# Altium PCB Centre_Console_3.0.PcbDoc
Units mm, origin at the board's own origin, x right, y up, seen from the top; angles counter-clockwise.
Board outline 60 x 50 mm, 2 copper layers (Top Layer, Bottom Layer); 35 components, 41 nets, 224 pads, 23 vias.
Unrouted connection lines stored in the file: 1.
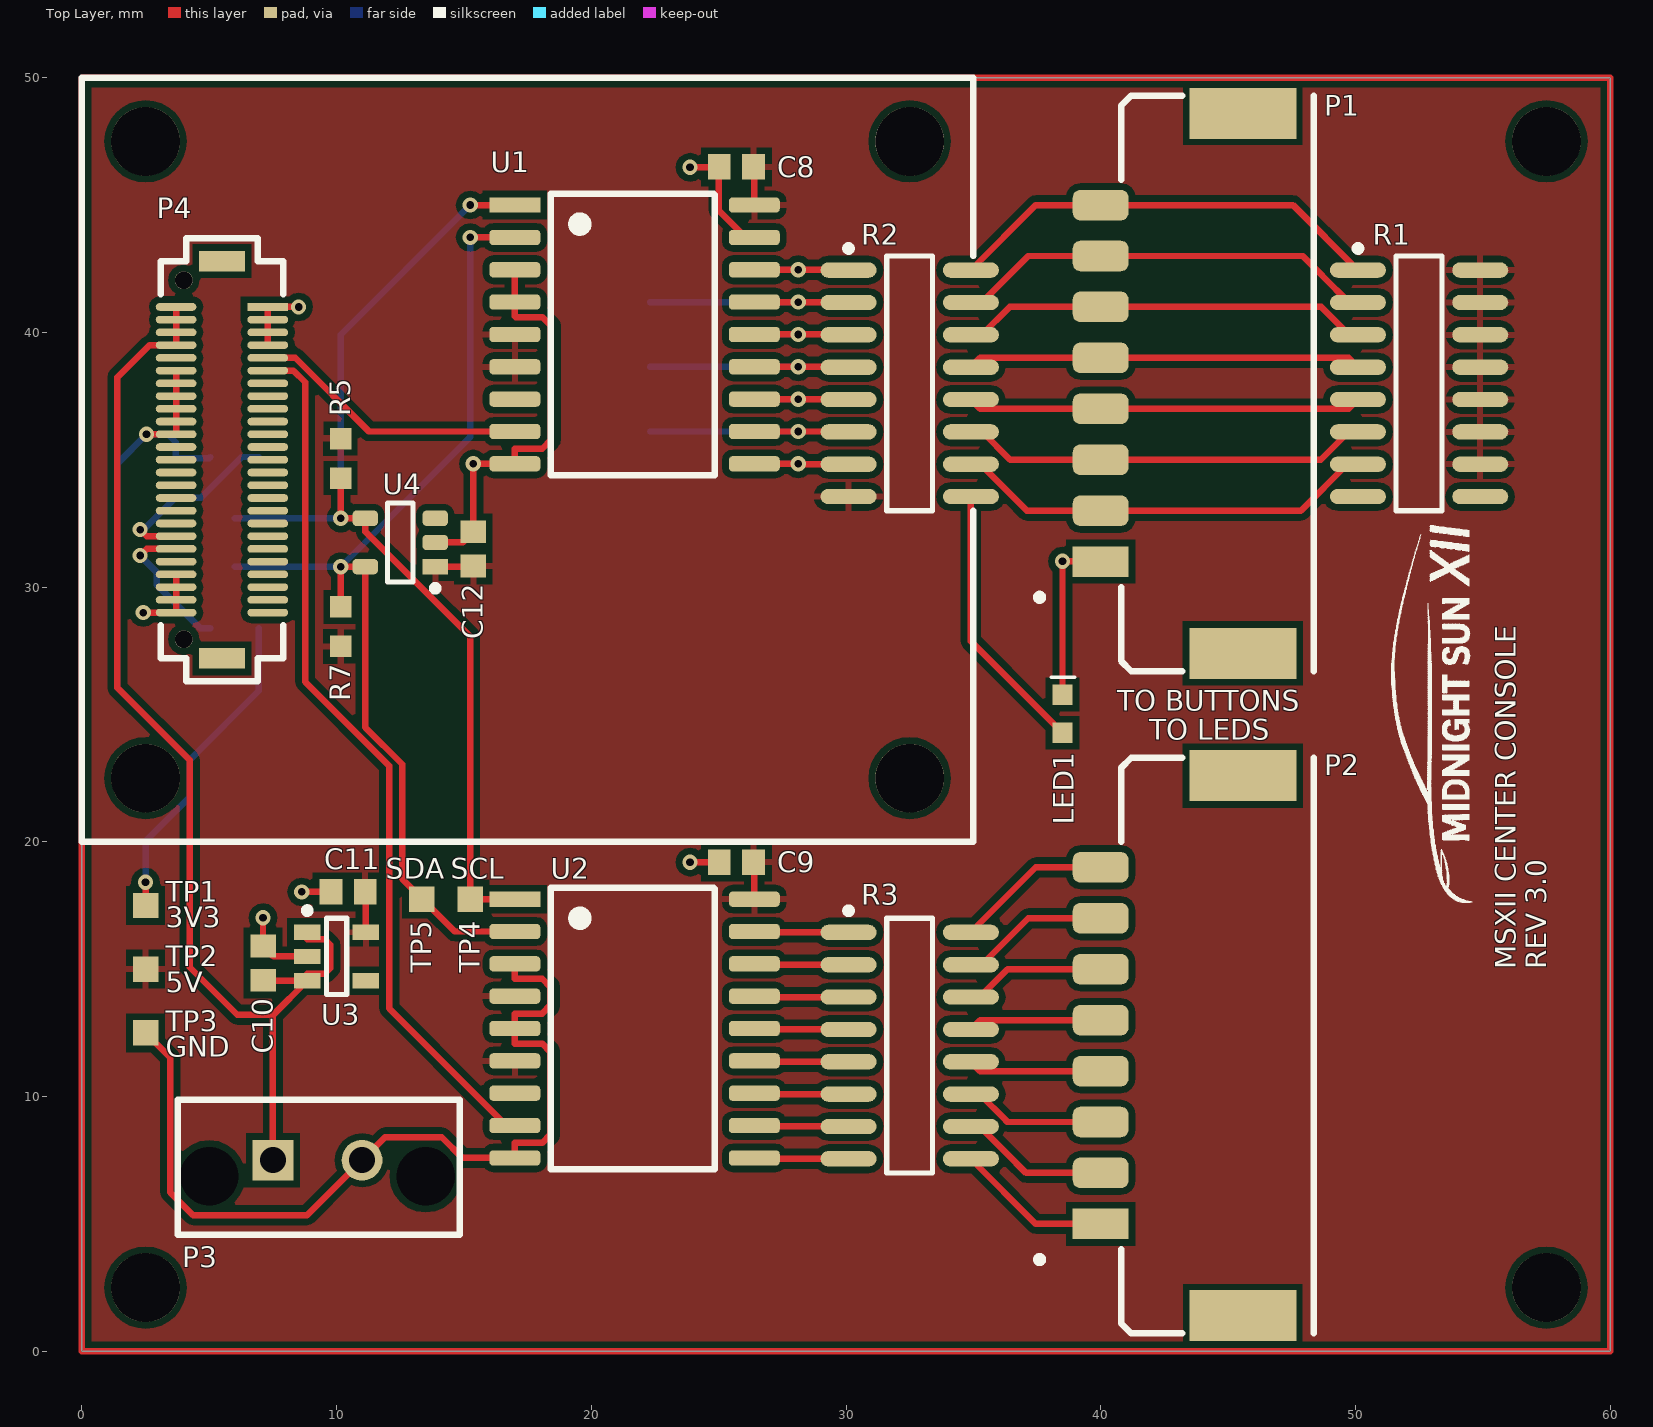
[diagram p0: Top Layer view]
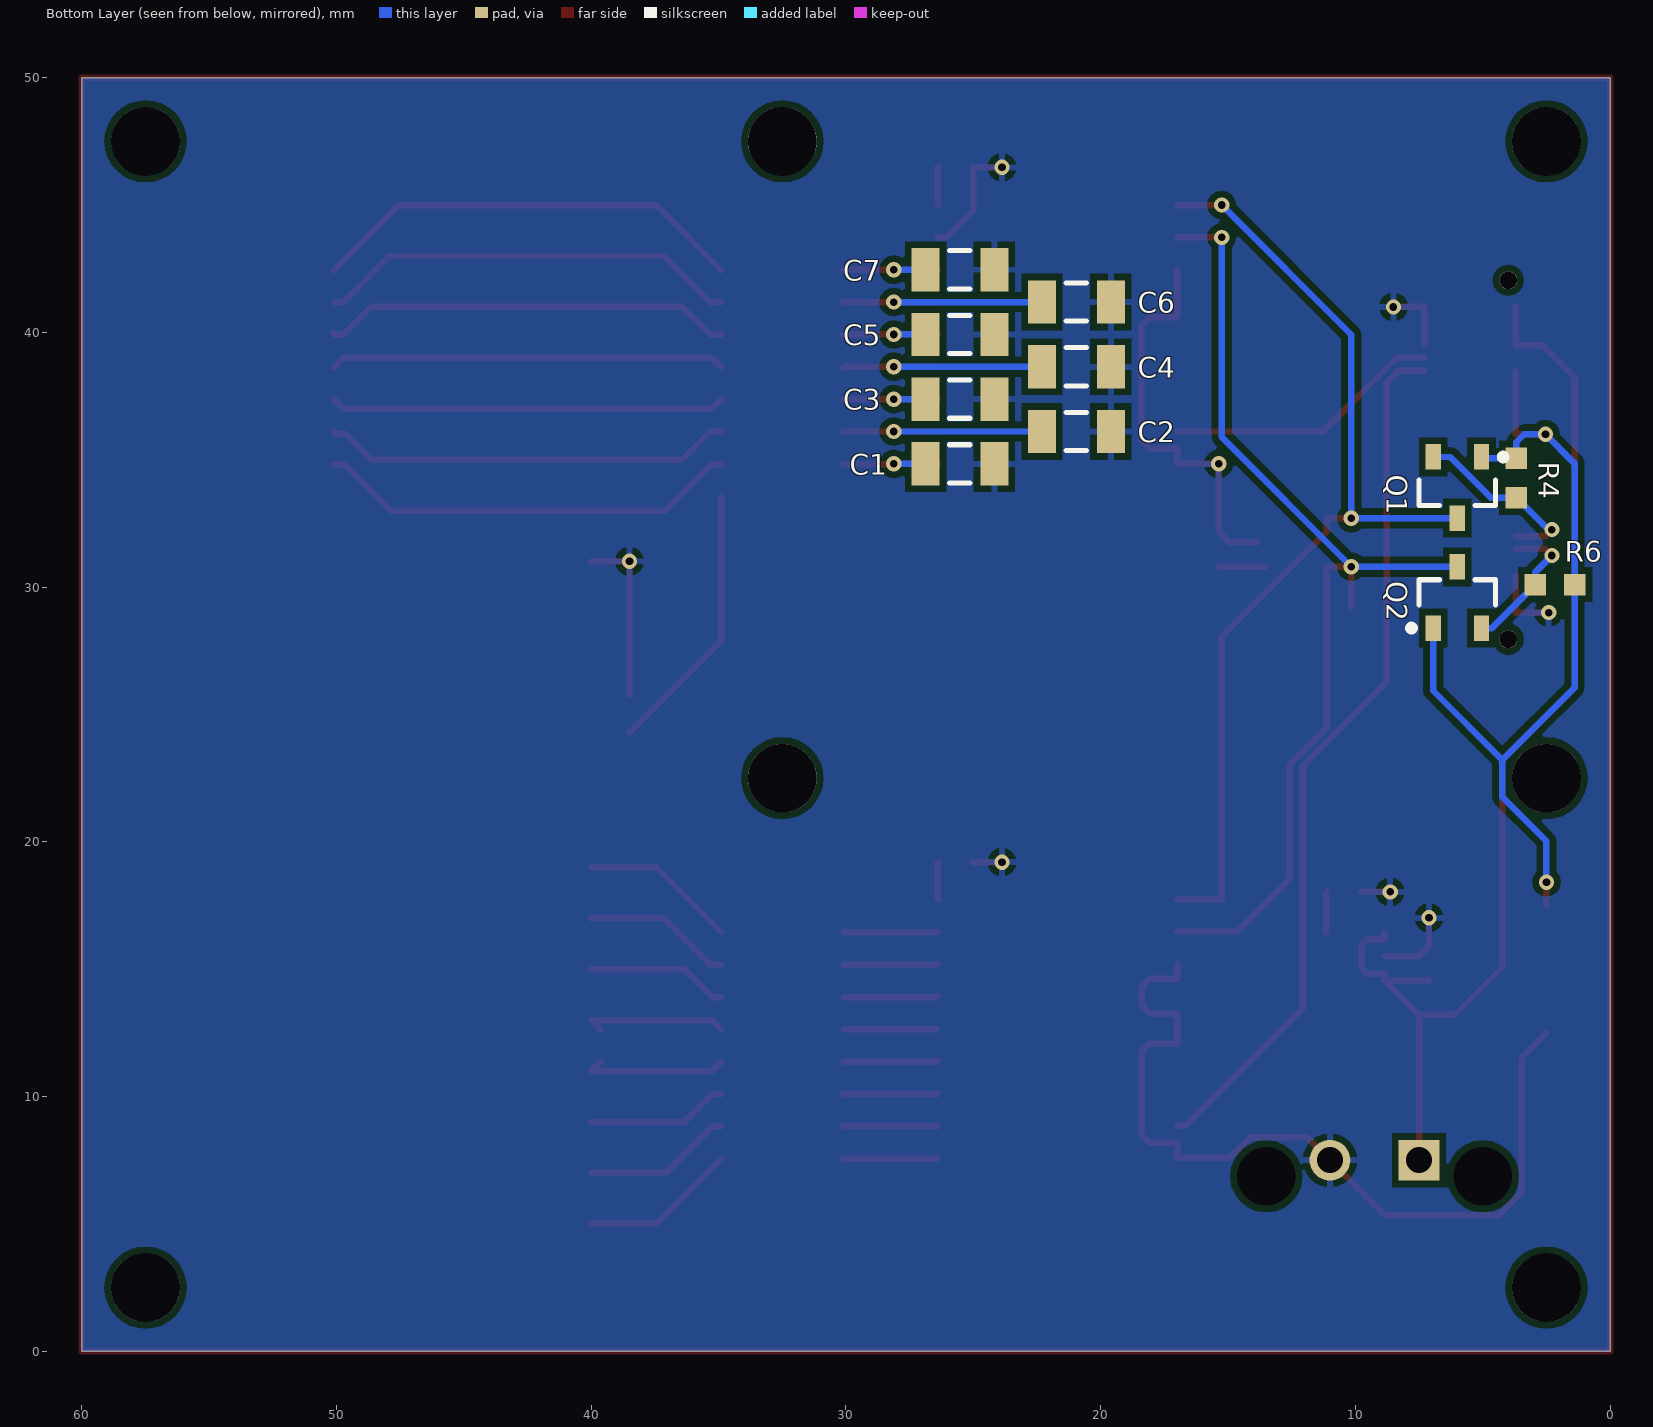
[diagram p1: Bottom Layer view, seen from below]
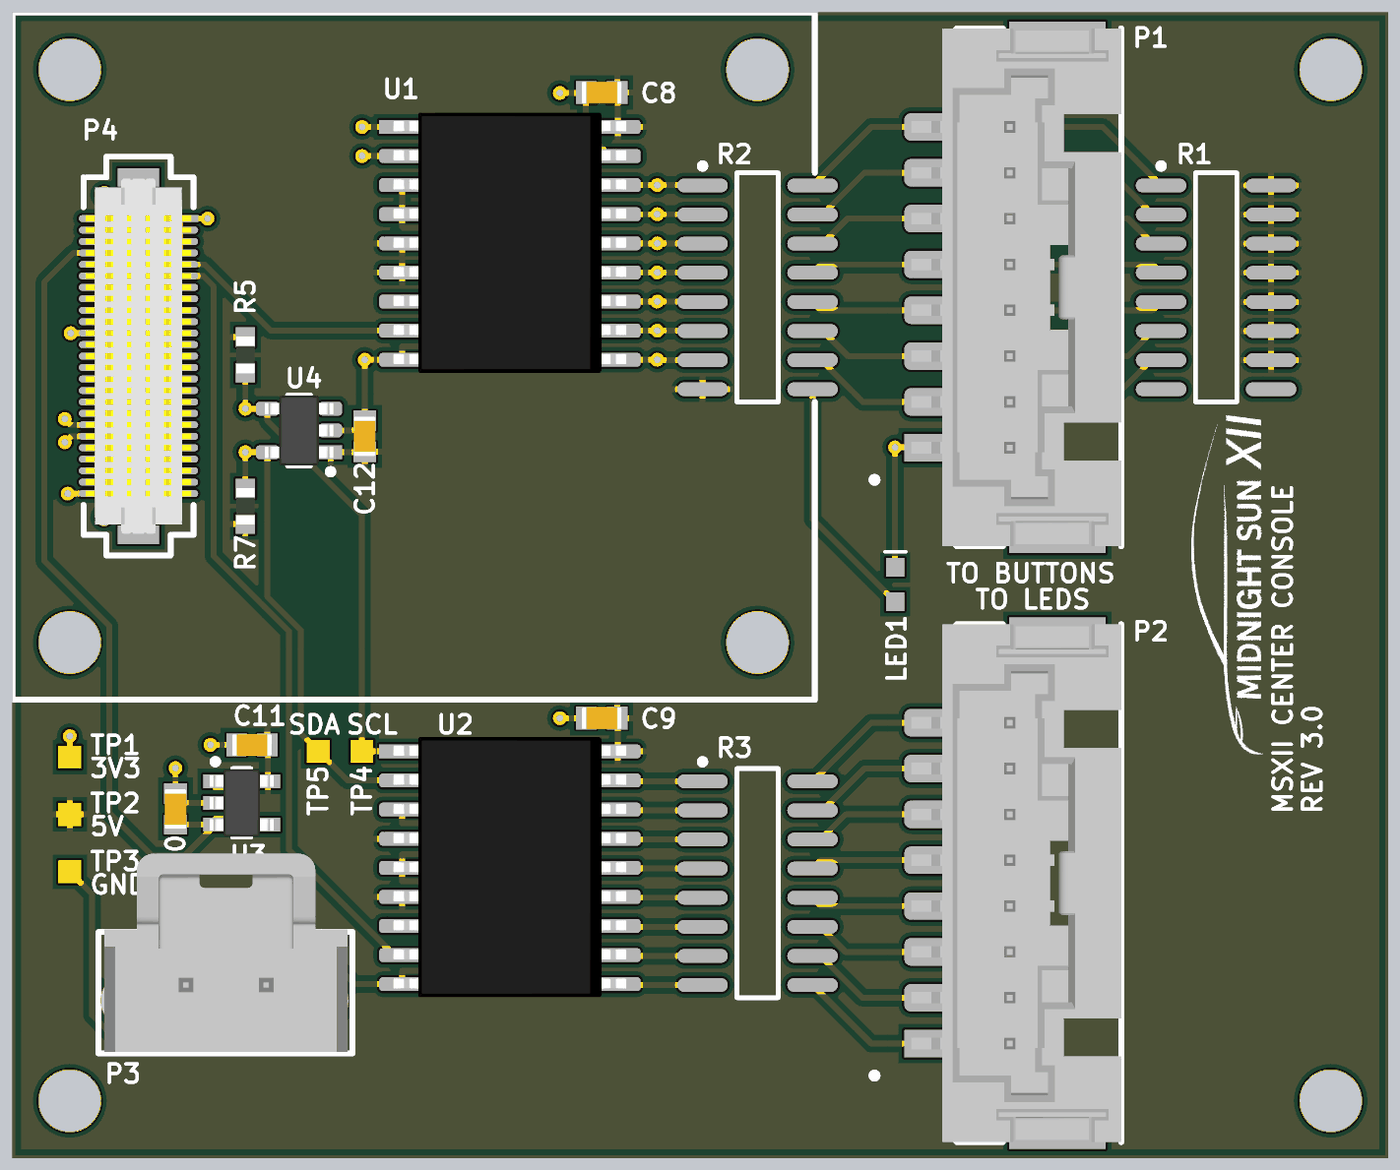
[diagram p2: 3D render of the assembled board from above, using the file's embedded part models]

## Layer stack, top to bottom
Top Solder: solder mask 0.0102, Solder Resist, Dk 3.5
Top Layer: signal copper 0.0356
Dielectric 1: dielectric 0.32, FR-4, Dk 4.8
Bottom Layer: signal copper 0.0356
Bottom Solder: solder mask 0.0102, Solder Resist, Dk 3.5

## Board outline
0,0 0,50 60,50 60,0

## Design rules (kind name [scope] priority, off if disabled: settings)
Clearance [All] p1: gap=0.254 ignorepadtopadclearanceinfootprint=TRUE except(0: Arc-Hole Track-Hole SMDPad-Hole THPad-Hole Via-Hole Fill-Hole Poly-Hole Region-Hole Text-Hole; 0.152: Arc-Arc Arc-Track Arc-SMDPad Track-Track Track-SMDPad SMDPad-SMDPad)
PolygonConnect [All] p1: connectstyle=Relief reliefconductorwidth=0.254 reliefentries=4 polygonreliefangle="90 Angle" airgapwidth=0.254
RoutingVias [All] p1: holewidth=0.711 width=1.27 viastyle="Through Hole" minholewidth=0.711 minwidth=1.27 maxholewidth=0.711 maxwidth=1.27
SolderMaskExpansion [All] p1: expansion=0.102
Width [All] p1: maxlimit=0.254 minlimit=0.254 preferedwidth=0.254
30 further rules are at their usual default settings.

## Classes and differential pairs
component class IO_Expanders: C1 C2 C3 C4 C5 C6 C7 C8 C9 LED1 P1 P2 R1 R2 R3 U1 U2
component class Controller_Interface: C10 C11 C12 P3 P4 Q1 Q2 R4 R5 R6 R7 TP1 TP2 TP3 TP4 TP5 U3 U4

## Components (designator, comment, footprint, x,y, rotation, side; value= is the part's Value field where it differs from the comment)
C1 "Cap Semi" C1206 25.527,34.84 r180 bottom value=0.1µF
C2 "Cap Semi" C1206 20.955,36.11 r0 bottom value=0.1µF
C3 "Cap Semi" C1206 25.527,37.38 r0 bottom value=0.1µF
C4 "Cap Semi" C1206 20.955,38.65 r0 bottom value=0.1µF
C5 "Cap Semi" C1206 25.527,39.92 r180 bottom value=0.1µF
C6 "Cap Semi" C1206 20.955,41.19 r180 bottom value=0.1µF
C7 "Cap Semi" C1206 25.527,42.46 r180 bottom value=0.1µF
C8 "CAP CER 0.1UF 50V 10% X7R 0603" "CAP, 0603" 25.7,46.5 r180 top
C9 "CAP CER 0.1UF 50V 10% X7R 0603" "CAP, 0603" 25.7,19.2 r180 top locked
C10 "CAP CER 1UF 50V 10% X7R 0603" "CAP, 0603" 7.112,15.24 r90 top locked
C11 "CAP CER 2.2UF 25V 10% X5R 0603" "CAP, 0603" 10.45,18.034 r180 top locked
C12 "CAP CER 0.1UF 50V 10% X7R 0603" "CAP, 0603" 15.367,31.5 r90 top
LED1 "LED GREEN CLEAR 2V 0603" LED_0603 38.51,24.331 r90 top
P1 "CONN 8POS DURA-CLIK 0.079\"" "CONN, 8POS Dura-Clik" 40,31 r90 top locked
P2 "CONN 8POS DURA-CLIK 0.079\"" "CONN, 8POS Dura-Clik" 40,5 r90 top locked
P3 "CONN 2POS ULTRA-FIT 0.138\"" "CONN, 2POS ULTRA-FIT" 7.5,7.5 r0 top locked
P4 "CONN 50POS Bergstak Plug 0.02\"" "CONN, Bergstak 50 Pos Plug" 5.5,35 r0 top locked
Q1 "MOSFET N-CH 60V 4A 3.3W SOT-223" "N-CH MOSFET SOT-23" 6,33.909 r270 bottom
Q2 "MOSFET N-CH 60V 4A 3.3W SOT-223" "N-CH MOSFET SOT-23" 6,29.591 r90 bottom
R1 "Res Pack3" SO-16_N 52.5,38 r0 top locked value=4.7K
R2 "Res Pack3" SO-16_N 32.5,38 r0 top value=10K
R3 "Res Pack1" SO-16_N 32.5,12 r0 top locked value=10K
R4 "RES 10K OHM 1% 1/10W 0603" "RES, 0603" 3.683,34.29 r270 bottom
R5 "RES 10K OHM 1% 1/10W 0603" "RES, 0603" 10.16,35.052 r270 top
R6 "RES 10K OHM 1% 1/10W 0603" "RES, 0603" 2.159,30.099 r180 bottom
R7 "RES 10K OHM 1% 1/10W 0603" "RES, 0603" 10.16,28.448 r90 top
TP1 "Test Point" "Test Point"#1 1.651,18.034 r90 top
TP2 "Test Point" "Test Point"#2 1.651,15.367 r90 top
TP3 "Test Point" "Test Point"#3 1.651,10.922 r90 top
TP4 "Test Point" "Test Point"#4 15.24,17.75 r90 top
TP5 "Test Point" "Test Point"#4 13.335,17.75 r90 top
U1 "MCP23008" "IC 18SOIC" 17,45 r270 top locked
U2 "MCP23008" "IC 18SOIC" 17,17.75 r270 top locked
U3 "IC REG LDO 5V 0.1A SOT23-5" SOT95P280X145-5N 10,15.5 r0 top locked
U4 "IC ACCELERATOR I2C 1CH TSOT23-5" "IC OP AMP GP RR 10MHZ SOT-23-5" 12.5,31.754 r180 top

## Footprints (in the part's own frame and the unit in brackets; to place one, negate y for a bottom-side part, rotate by r counter-clockwise, add the part's x,y. Pads: shape width x height; smd on the part's side, far side on the other; paste and mask are expansions set on the pad)
C1206 [mm] "Chip Capacitor, Body 3.2x1.6mm, IPC High Density"
  rect 1.1x1.7 smd: 1(-1.35,0) 2(1.35,0)
  silkscreen extent -0.4,-0.75 0.4,0.75, body extent -1.7,-0.9 1.7,0.9, height 1.3
"CAP, 0603" [mm] "Chip Capacitor, 2-Leads, Body 1.60x0.81mm, IPC Medium Density"
  rect 0.9x1 smd mask+0.076: 1(-0.675,0) 2(0.675,0)
  body extent -0.87,-0.48 0.87,0.48, height 0.9
"CONN, 2POS ULTRA-FIT" [mm] "2 Positions Header, Shrouded Connector 0.138\" (3.50mm) Through Hole Gold"
  rect 1.6x1.6 hole 1.02: 1(0,0)
  round 1.6 hole 1.02: 2(3.5,0)
  round 1.6 hole 2.3: ""(-2.5,-0.63) ""(6,-0.63)
  silkscreen extent -3.74,-2.93 7.33,2.37, body extent -3.48,-2.87 7.12,5.79, height 13.85
"CONN, 8POS Dura-Clik" [mm] "WM10868CT-ND"
  rect 1.2x2.2 smd: 1(0,0)
  rrect50% 1.2x2.2 smd: 2(2,0) 3(4,0) 4(6,0) 5(8,0) 6(10,0) 7(12,0) 8(14,0)
  rect 2x4.2 smd: ""(-3.6,-5.58) ""(17.6,-5.58)
  silkscreen extent -4.3,-8.36 18.3,2.53, body extent -4.3,-8.36 18.3,0.79, height 8.02
"CONN, Bergstak 50 Pos Plug" [mm] "Bergstak 50 Position Plug"
  rect 1.6x0.3 smd: 1(1.8,6)
  oval 1.6x0.3 smd: 2(1.8,5.5) 3(1.8,5) 4(1.8,4.5) 5(1.8,4) 6(1.8,3.5) 7(1.8,3) 8(1.8,2.5) 9(1.8,2) 10(1.8,1.5) 11(1.8,1) 12(1.8,0.5) 13(1.8,0) 14(1.8,-0.5) 15(1.8,-1) 16(1.8,-1.5) 17(1.8,-2) 18(1.8,-2.5) 19(1.8,-3) 20(1.8,-3.5) 21(1.8,-4) 22(1.8,-4.5) 23(1.8,-5) 24(1.8,-5.5) 25(1.8,-6) 26(-1.8,-6) 27(-1.8,-5.5) 28(-1.8,-5) 29(-1.8,-4.5) 30(-1.8,-4) 31(-1.8,-3.5) 32(-1.8,-3) 33(-1.8,-2.5) 34(-1.8,-2) 35(-1.8,-1.5) 36(-1.8,-1) 37(-1.8,-0.5) 38(-1.8,0) 39(-1.8,0.5) 40(-1.8,1) 41(-1.8,1.5) 42(-1.8,2) 43(-1.8,2.5) 44(-1.8,3) 45(-1.8,3.5) 46(-1.8,4) 47(-1.8,4.5) 48(-1.8,5) 49(-1.8,5.5) 50(-1.8,6)
  round 0.7 hole 0.7: ""(-1.5,-7.05) ""(-1.5,7.05)
  rect 1.8x0.8 smd: ""(0,-7.8) ""(0,7.8)
  silkscreen extent -2.4,-8.7 2.4,8.7, body extent -2.3,-7.75 2.3,7.75, height 4.2
"IC 18SOIC" [mm]
  rect 0.6x2 smd: 1(0,0)
  rrect50% 0.6x2 smd: 2(1.27,0) 3(2.54,0) 4(3.81,0) 5(5.08,0) 6(6.35,0) 7(7.62,0) 8(8.89,0) 9(10.16,0) 10(10.16,9.4) 11(8.89,9.4) 12(7.62,9.4) 13(6.35,9.4) 14(5.08,9.4) 15(3.81,9.4) 16(2.54,9.4) 17(1.27,9.4) 18(0,9.4)
  silkscreen extent -0.45,1.4 10.6,7.85, body extent -0.62,-0.38 10.72,9.78, height 2
"IC OP AMP GP RR 10MHZ SOT-23-5" [mm] "SOT23, 5-Leads, Body 2.90x2.80mm, Pitch 0.95mm, IPC Medium Density"
  rect 1x0.6 smd: 1(-1.375,0.95)
  rrect50% 1x0.6 smd: 2(-1.375,0) 3(-1.375,-0.95) 4(1.375,-0.95) 5(1.375,0.95)
  silkscreen extent -1.5,-1.55 0.5,1.92, body extent -1.5,-1.53 1.5,1.53, height 1.45
LED_0603 [mm]
  rect 0.8x0.8 smd: 1(-0.05,0.01) 2(1.45,0.01)
  silkscreen extent 2.13,-0.46 2.13,0.45, body extent -0.09,-0.39 1.51,0.41, height 0.8
"N-CH MOSFET SOT-23" [mm] "SI2318CDS-T1-GE3CT-ND"
  rect 1x0.6 smd: 1(-1.2,0.95) 2(-1.2,-0.95) 3(1.2,0)
  silkscreen extent -1.32,-1.5 0.7,1.92, body extent -0.7,-1.52 0.7,1.52, height 1.12
"RES, 0603" [mm] "Chip Resistor, 2-Leads, Body 1.60x0.80mm, IPC Medium Density"
  rect 0.85x0.85 smd: 1(-0.775,0) 2(0.775,0)
  body extent -0.8,-0.4 0.8,0.4, height 0.55
SO-16_N [mm] "SOIC, 16-Leads, Body 9.9x3.9mm, Pitch 1.27mm, IPC Medium Density"
  oval 2.2x0.6 smd: 1(-2.4,4.445) 2(-2.4,3.175) 3(-2.4,1.905) 4(-2.4,0.635) 5(-2.4,-0.635) 6(-2.4,-1.905) 7(-2.4,-3.175) 8(-2.4,-4.445) 9(2.4,-4.445) 10(2.4,-3.175) 11(2.4,-1.905) 12(2.4,-0.635) 13(2.4,0.635) 14(2.4,1.905) 15(2.4,3.175) 16(2.4,4.445)
  silkscreen extent -2.52,-5 0.9,5.42, body extent -2,-5 2,5, height 1.75
SOT95P280X145-5N [mm] "SOT23, 5-Leads, Body 2.95x2.80mm, Pitch 0.95mm, IPC Medium Density"
  rect 1.05x0.6 smd: 1(-1.15,0.95) 2(-1.15,0) 3(-1.15,-0.95) 4(1.15,-0.95) 5(1.15,0.95)
  silkscreen extent -1.27,-1.5 0.4,1.92, body extent -1.4,-1.48 1.4,1.48, height 1.45
"Test Point"#1 [mm]
  rect 1x1 smd paste-2: TP(-0.534,-0.849)
"Test Point"#2 [mm]
  rect 1x1 smd paste-2: TP(-0.367,-0.849)
"Test Point"#3 [mm]
  rect 1x1 smd paste-2: TP(1.578,-0.849)
"Test Point"#4 [mm]
  rect 1x1 smd paste-2: TP(0,0)

## Part data
C1 C2 C3 C4 C5 C6 C7: "Capacitor (Semiconductor SIM Model)", LatestRevisionDate=29-May-2009, LatestRevisionNote="IPC-7351 Footprint Added.", PackageDescription="Chip Capacitor", PackageReference=C1206, Published=8-Jun-2000, Publisher="Altium Limited"
C8 C9 C12: "0.10µF ±10% 50V Ceramic Capacitor X7R 0603 (1608 Metric)", Capacitance=0.1µF, Manufacturer 1="AVX Corporation", Manufacturer Part Number 1=06035C104KAT2A, Operating Temperature="-55°C ~ 125°C", Package / Case="0603 (1608 Metric)", Ratings=-, Supplier Part Number 1=478-5052-1-ND, Temperature Coefficient=X7R, Tolerance=±10%, Voltage=50V, ComponentLink1Description=http://datasheets.avx.com/X7RDielectric.pdf, ComponentLink1URL=http://datasheets.avx.com/X7RDielectric.pdf, Height - Seated (Max)=-, Lead Spacing=-, Lead Style=-, Mounting Type="Surface Mount, MLCC", Packaging="Cut Tape (CT)", Part Status=Active, Size / Dimension="0.063\" L x 0.032\" W (1.60mm x 0.81mm)", Supplier 1=Digi-Key, Thickness (Max)="0.035\" (0.90mm)"
C10: "1µF ±10% 50V Ceramic Capacitor X7R 0603 (1608 Metric)", Capacitance=1µF, Manufacturer 1="Taiyo Yuden", Manufacturer Part Number 1=UMK107AB7105KA-T, Operating Temperature="-55°C ~ 125°C", Package / Case="0603 (1608 Metric)", Ratings=-, Supplier Part Number 1=587-3247-1-ND, Temperature Coefficient=X7R, Tolerance=±10%, Voltage=50V, ComponentLink1Description=http://www.yuden.co.jp/productdata/catalog/en/mlcc_all_e.pdf, ComponentLink1URL=http://www.yuden.co.jp/productdata/catalog/en/mlcc_all_e.pdf, Height - Seated (Max)=-, Lead Spacing=-, Lead Style=-, Mounting Type="Surface Mount, MLCC", Packaging="Cut Tape (CT)", Part Status=Active, Size / Dimension="0.063\" L x 0.031\" W (1.60mm x 0.80mm)", Supplier 1=Digi-Key, Thickness (Max)="0.037\" (0.95mm)"
C11: "2.2µF ±10% 25V Ceramic Capacitor X5R 0603 (1608 Metric)", Capacitance=2.2µF, Manufacturer 1="Murata Electronics North America", Manufacturer Part Number 1=GRM188R61E225KA12D, Operating Temperature="-55°C ~ 85°C", Package / Case="0603 (1608 Metric)", Ratings=-, Supplier Part Number 1=490-10731-1-ND, Temperature Coefficient=X5R, Tolerance=±10%, Voltage=25V, ComponentLink1Description=http://www.murata.com/~/media/webrenewal/support/library/catalog/products/capacitor/mlcc/c02e.ashx, ComponentLink1URL=http://www.murata.com/~/media/webrenewal/support/library/catalog/products/capacitor/mlcc/c02e.ashx, Height - Seated (Max)=-, Lead Spacing=-, Lead Style=-, Mounting Type="Surface Mount, MLCC", Packaging="Cut Tape (CT)", Part Status=Active, Size / Dimension="0.063\" L x 0.031\" W (1.60mm x 0.80mm)", Supplier 1=Digi-Key, Thickness (Max)="0.035\" (0.90mm)"
LED1: "Green 572nm LED Indication - Discrete 2V 0603 (1608 Metric)", Color=Green, Current - Test=20mA, Lens Color=Colorless, Manufacturer="Wurth Electronics Inc.", Manufacturer Part Number=150060VS75000, Millicandela Rating=40mcd, Package / Case="0603 (1608 Metric)", Supplier Device Package=0603, Supplier Part Number 1=732-4980-1-ND, Voltage - Forward (Vf) (Typ)=2V, Category=Optoelectronics, ComponentLink1Description=http://katalog.we-online.de/led/datasheet/150060VS75000.pdf, ComponentLink1URL=http://katalog.we-online.de/led/datasheet/150060VS75000.pdf, Features=-, Height (Max)=0.80mm, Lens Style/Size="Rectangle with Flat Top, 1.10mm x 0.70mm", Lens Transparency=Clear, Mounting Type="Surface Mount", Packaging="Cut Tape (CT)", Part Status=Active, Pricing 1="1=0.21, 100=0.1617, 500=0.13964 (CAD)", RoHS="RoHS Compliant", Size / Dimension="1.60mm L x 0.80mm W", Stock 1=9408, Supplier 1=Digi-Key, Viewing Angle=140°, Wavelength - Dominant=570nm, Wavelength - Peak=572nm
P1 P2: "8 Positions Header Connector 0.079\" (2.00mm) Surface Mount Tin", Current Rating=-, Insulation Color=Natural, Manufacturer 1="Molex, LLC", Manufacturer Part Number 1=5600200820, Supplier Part Number 1=WM10868CT-ND, ComponentLink1Description=http://www.molex.com/pdm_docs/sd/5600200820_sd.pdf, ComponentLink1URL=http://www.molex.com/pdm_docs/sd/5600200820_sd.pdf, Connector Type=Header, Contact Finish - Mating=Tin, Contact Finish - Post=Tin, Contact Finish Thickness - Mating=-, Contact Finish Thickness - Post=-, Contact Length - Mating=-, Contact Length - Post=-, Contact Material="Copper Alloy", Contact Shape=Square, Contact Type="Male Pin", Fastening Type="Latch Lock", Ingress Protection=-, Insulation Height="0.315\" (8.00mm)", Insulation Material="Polyamide (PA), Nylon", Mated Stacking Heights=9.3mm, Material Flammability Rating=-, Mounting Type="Surface Mount", Number of Positions=8, Number of Positions Loaded=All, Number of Rows=1, Operating Temperature=-, Overall Contact Length=-, Packaging="Cut Tape (CT)", Part Status=Active, Pitch - Mating="0.079\" (2.00mm)", Row Spacing - Mating=-, Series=DuraClik, Shrouding="Shrouded - 4 Wall", Style="Board to Cable/Wire", Supplier 1=Digi-Key, Termination=Solder, Voltage=-
P3: "2 Positions Header, Shrouded Connector 0.138\" (3.50mm) Through Hole Gold", Current Rating=-, Insulation Color=Black, Manufacturer 1="Molex, LLC", Manufacturer Part Number 1=1722861302, Material Flammability Rating="UL94 V-0", Operating Temperature="-40°C ~ 120°C", Supplier Part Number 1=WM11673-ND, Voltage=400V, ComponentLink1Description=http://www.molex.com/pdm_docs/sd/1722861302_sd.pdf, ComponentLink1URL=http://www.molex.com/pdm_docs/sd/1722861302_sd.pdf, Connector Type=Header, Contact Finish - Mating=Gold, Contact Finish - Post=Tin, Contact Finish Thickness - Mating="30µin (0.76µm)", Contact Finish Thickness - Post="60µin (1.52µm)", Contact Length - Mating=-, Contact Length - Post="0.126\" (3.20mm)", Contact Material="Copper Alloy", Contact Shape=Square, Contact Type="Male Pin", Fastening Type="Latch Holder", Ingress Protection=-, Insulation Height="0.465\" (11.80mm)", Insulation Material="Liquid Crystal Polymer (LCP)", Mated Stacking Heights=26.99mm, Mounting Type="Through Hole", Number of Positions=2, Number of Positions Loaded=All, Number of Rows=1, Overall Contact Length=-, Packaging=Tray, Part Status=Active, Pitch - Mating="0.138\" (3.50mm)", Row Spacing - Mating=-, Series=UltraFit, Shrouding="Shrouded - 4 Wall", Style="Board to Board or Cable", Supplier 1=Digi-Key, Termination="Kinked Pin, Solder"
P4: "50 Position Connector Plug, Outer Shroud Contacts Surface Mount Gold", Manufacturer 1="Amphenol FCI", Manufacturer Part Number 1=10132797-055100LF, Supplier Part Number 1=609-5226-1-ND, ComponentLink1Description=http://portal.fciconnect.com/Comergent//fci/drawing/10132797.pdf, ComponentLink1URL=http://portal.fciconnect.com/Comergent//fci/drawing/10132797.pdf, Connector Type="Plug, Outer Shroud Contacts", Contact Finish=Gold, Contact Finish Thickness="1µin (0.025µm)", Height Above Board="0.169\" (4.30mm)", Mated Stacking Heights=5mm, Mounting Type="Surface Mount", Number of Positions=50, Number of Rows=2, Packaging="Cut Tape (CT)", Part Status=Active, Pitch="0.020\" (0.50mm)", Series="BergStak Plug", Supplier 1=Digi-Key
Q1 Q2: "N-Channel 60V 4A (Tc) 3.3W (Tc) Surface Mount SOT-223", Current - Continuous Drain (Id) @ 25°C="4A (Tc)", Drain to Source Voltage (Vdss)=60V, Drive Voltage (Max Rds On,  Min Rds On)="5V, 10V", Input Capacitance (Ciss) (Max) @ Vds="340pF @ 25V", Manufacturer 1=STMicroelectronics, Manufacturer Part Number 1=STN3NF06L, Operating Temperature="-55°C ~ 150°C (TJ)", Package / Case="TO-261-4, TO-261AA", Power Dissipation (Max)="3.3W (Tc)", Supplier Device Package=SOT-223, Supplier Part Number 1=497-3177-1-ND, ComponentLink1Description=http://www.st.com/content/ccc/resource/technical/document/datasheet/b1/52/93/f0/a9/a9/40/d7/CD00002430.pdf/files/CD00002430.pdf/jcr:content/translations/en.CD00002430.pdf, ComponentLink1URL=http://www.st.com/content/ccc/resource/technical/document/datasheet/b1/52/93/f0/a9/a9/40/d7/CD00002430.pdf/files/CD00002430.pdf/jcr:content/translations/en.CD00002430.pdf, FET Feature=-, FET Type=N-Channel, Gate Charge (Qg) (Max) @ Vgs="9nC @ 5V", Mounting Type="Surface Mount", Packaging="Cut Tape (CT)", Part Status=Active, Rds On (Max) @ Id, Vgs="100 mOhm @ 1.5A, 10V", Supplier 1=Digi-Key, Technology="MOSFET (Metal Oxide)", Vgs (Max)=±16V, Vgs(th) (Max) @ Id="2.8V @ 250µA"
R1 R2: "Isolated Resistor Network", Code_IPC=SOIC127P600-16, Code_JEDEC=MS-012-AC, LatestRevisionDate=29-May-2009, LatestRevisionNote="IPC-7351 Footprint Added.", PackageDescription="16-Pin Small Outline Integrated Circuit 1.27 mm Pitch", PackageReference=SO-16, Published=24-Mar-1999, Publisher="Altium Limited"
R3: library part "Res Pack3", "Isolated Resistor Network", Code_IPC=SOIC127P600-16, Code_JEDEC=MS-012-AC, LatestRevisionDate=29-May-2009, LatestRevisionNote="IPC-7351 Footprint Added.", PackageDescription="16-Pin Small Outline Integrated Circuit 1.27 mm Pitch", PackageReference=SO-16, Published=24-Mar-1999, Publisher="Altium Limited"
R4 R5 R6 R7: "RES SMD 10K OHM 1% 1/10W 0603", Manufacturer 1=Yageo, Manufacturer Part Number 1=RC0603FR-0710KL, Operating Temperature="-55°C ~ 155°C", Package / Case="0603 (1608 Metric)", Power=1/10W, Resistance=10k, Supplier Device Package=0603, Supplier Part Number 1=311-10.0KHRCT-ND, Temperature Coefficient=±100ppm/°C, Tolerance=±1%, ComponentLink1Description=http://www.yageo.com/documents/recent/PYu-RC_Group_51_RoHS_L_7.pdf, ComponentLink1URL=http://www.yageo.com/documents/recent/PYu-RC_Group_51_RoHS_L_7.pdf, Composition="Thick Film", Failure Rate=-, Height - Seated (Max)="0.022\" (0.55mm)", Packaging="Cut Tape (CT)", Part Status=Active, Size / Dimension="0.063\" L x 0.031\" W (1.60mm x 0.80mm)", Supplier 1=Digi-Key
U1 U2: library part "IC I/O EXPANDER I2C 8B 18SOIC", "MCP23008 I/O Expander 8B+1Int 18P SOIC", Current - Output Source/Sink=25mA, Manufacturer="Microchip Technology", Manufacturer Part Number=MCP23008T-E/SO, Operating Temperature="-40°C ~ 125°C", Package / Case="18-SOIC (0.295\", 7.50mm Width)", Supplier Device Package=18-SOIC, Supplier Part Number 1=MCP23008T-E/SOCT-ND, Voltage - Supply="1.8 V ~ 5.5 V", Category="Integrated Circuits (ICs)", ComponentLink1Description=http://www.microchip.com/mymicrochip/filehandler.aspx?ddocname=en021920, ComponentLink1URL=http://www.microchip.com/mymicrochip/filehandler.aspx?ddocname=en021920, Features=POR, Interface=I²C, Interrupt Output=Yes, Mounting Type="Surface Mount", Number of I/O=8, Output Type=Push-Pull, Packaging="Cut Tape (CT)", Part Status=Active, Pricing 1="1=1.62, 25=1.3548, 100=1.2431 (CAD)", RoHS="RoHS Compliant", Stock 1=5607, Supplier 1=Digi-Key
U3: "Linear Voltage Regulator IC Positive Fixed Output 5V 100mA SOT-23-5", Current - Limit (Min)=-, Current - Output=100mA, Manufacturer 1=STMicroelectronics, Manufacturer Part Number 1=LD2981CM50TR, Operating Temperature="-40°C ~ 125°C", Package / Case="SC-74A, SOT-753", Supplier Device Package=SOT-23-5, Supplier Part Number 1=497-7787-1-ND, Voltage - Dropout (Typical)="0.18V @ 100mA", Voltage - Input="Up to 16V", Voltage - Output=5V, ComponentLink1Description=http://www.st.com/content/ccc/resource/technical/document/datasheet/group1/b7/b5/a1/83/9c/bd/4a/90/CD00001635/files/CD00001635.pdf/jcr:content/translations/en.CD00001635.pdf, ComponentLink1URL=http://www.st.com/content/ccc/resource/technical/document/datasheet/group1/b7/b5/a1/83/9c/bd/4a/90/CD00001635/files/CD00001635.pdf/jcr:content/translations/en.CD00001635.pdf, Mounting Type="Surface Mount", Packaging="Cut Tape (CT)", Part Status=Active, Regulator Topology="Positive Fixed", Supplier 1=Digi-Key
U4: "Accelerator 1 Channel 400kHz TSOT-23-5", Base Part Number=LTC1694, Current - Supply=60µA, Manufacturer="Linear Technology/Analog Devices", Manufacturer Part Number=LTC1694CS5#TRMPBF, Operating Temperature="0°C ~ 70°C", Package / Case="SOT-23-5 Thin, TSOT-23-5", Supplier Device Package=TSOT-23-5, Supplier Part Number=LTC1694CS5, Supplier Part Number 1=LTC1694CS5#TRMPBFCT-ND, Voltage - Supply="2.7 V ~ 6 V", Applications=I²C, Category="Integrated Circuits (ICs)", ComponentLink1Description=http://www.linear.com/docs/3505, ComponentLink1URL=http://www.linear.com/docs/3505, Data Rate (Max)=400kHz, Delay Time=-, Input="2-Wire Bus", Number of Channels=1, Output="2-Wire Bus", Packaging="Cut Tape (CT)", Part Status=Active, Pricing 1="1=4.79, 25=4.278, 100=2.5493, 250=2.33692 (CAD)", RoHS="RoHS Compliant", Signal Conditioning=-, Stock 1=794, Supplier 1=Digi-Key, Type=Accelerator

## Free pads (board coordinates)
  round 2.7 hole 2.7: ""(2.5,2.5) ""(2.5,22.5) ""(2.5,47.5) ""(32.5,22.5) ""(32.5,47.5) ""(57.5,2.5) ""(57.5,47.5)

## Via types
v1: diameter 0.6, hole 0.3, Top Layer to Bottom Layer, 23 vias

## Nets (pads, with @x,y where several pads share a name; then routed paths per layer and width w, separated by ;. In a path a pad name is that pad's centre, name@x,y a point inside that pad or via, vN(x,y) a via of type N, cw(c..) or ccw(c..) an arc to the next point about the centre after c; other vN are vias at no path point)
3V3: P4.40 P4.41 P4.42 P4.43 P4.44 P4.45 Q1.1 Q2.1 R4.1 R6.2 TP1.TP | length 34.1
  Top Layer w0.254: TP1.TP v1(2.5,18.415) ; v1(2.54,36) P4.40 P4.41 P4.42 P4.43 P4.44 P4.45@3.7,38.469
  Bottom Layer w0.254: v1(2.5,18.415) 2.5,20.026 4.231,21.757 4.231,21.783 ; 4.231,21.783 4.231,23.217 ; Q1.1 5.006,35.065 R4.1 3.683,35.687 3.37,36 v1(2.54,36) 1.397,34.857 1.397,26.051 4.231,23.217 ; Q2.1 6.95,25.936 4.231,23.217
+5V: C8.1 C9.1 C11.1 C12.1 R1.10 R1.11 R1.12 R1.13 R1.14 R1.15 R1.16 R2.8 R5.1 R7.1 TP2.TP U1.5 U1.6 U1.18 U2.4 U2.6 U2.18 U3.5 U4.1 | length 6.5
  Top Layer w0.254: C11.1 11.15,18.009 U3.5 ; U4.1@13.518,30.804 U4.1 15.346,30.804 C12.1 ; C9.1 26.4,19.175 U2.18 ; U1.18@26.375,45.025 U1.18 26.4,46.475 C8.1
+12V: C10.1 P3.1 P4.47 P4.48 P4.49 P4.50 U3.1 U3.3 | length 45.5
  Top Layer w0.254: P4.50 P4.49 P4.48 P4.47 3.7,39.497 2.655,39.497 1.397,38.239 1.397,26.051 4.231,23.217 4.231,21.783 ; 4.231,21.783 4.231,15.073 6.096,13.208 7.5,13.208 7.5,13.2 ; C10.1 7.127,14.55 U3.3 ; P3.1 7.5,13.2 ; U3.1 8.85,16.181 9.533,16.181 9.756,15.958 9.756,15.042 9.533,14.819 8.85,14.819 U3.3 ; 7.5,13.2 U3.3
GND: C1.2 C2.1 C3.1 C4.1 C5.2 C6.2 C7.2 C8.2 C9.2 C10.2 C11.2 C12.2 LED1.2 P1.1 P3.2 P4.1 P4.2 P4.3 P4.4 P4.26 P4.27 P4.28 P4.29 TP3.TP U1.3 U1.4 U1.9 U1.17 U2.3 U2.5 U2.9 U3.2 U4.2 | length 72.7
  Top Layer w0.254: v1(2.413,29) P4.26 P4.27 P4.28 P4.29@3.7,30.469 ; TP3.TP 3.469,11.531 3.469,6.236 4.366,5.339 8.839,5.339 P3.2 11.901,8.401 14.134,8.401 14.945,7.59 U2.9 17,8.179 18.07,8.179 18.381,8.49 18.381,11.77 18.07,12.081 17,12.081 U2.5 17,13.259 18.07,13.259 18.381,13.57 18.381,14.31 18.07,14.621 17,14.621 U2.3 ; v1(7.112,17.018) C10.2 7.527,15.5 U3.2 ; P4.4@7.3,39.531 P4.3 P4.2 P4.1 v1(8.509,41) ; v1(8.636,18.034) C11.2 ; U4.2 14.946,31.754 C12.2 v1(15.367,34.84) U1.9 17,35.429 18.07,35.429 18.415,35.774 18.415,40.256 18.07,40.601 17.039,40.601 17,40.64 U1.4 U1.3 ; v1(23.876,19.2) C9.2 ; v1(23.876,46.482) 25.007,46.482 25.007,44.786 26.063,43.73 U1.17 ; LED1.2 v1(38.5,31.015) 39.985,31.015 P1.1
GP0/POWER_BTN: C1.1 R2.7 U1.10 | length 5
  Top Layer w0.254: U1.10 v1(28.125,34.84) 28.14,34.825 R2.7 R2.7@30.085,34.84
  Bottom Layer w0.254: C1.1 v1(28.125,34.84)
GP0/POWER_LED: R3.8 U2.10 | length 3.7
  Top Layer w0.254: U2.10 26.435,7.555 R3.8
GP1/DRIVE_BTN: C2.2 R2.6 U1.11 | length 9.5
  Top Layer w0.254: U1.11 v1(28.125,36.11) 30.085,36.11 R2.6
  Bottom Layer w0.254: C2.2 v1(28.125,36.11)
GP1/DRIVE_LED: R3.7 U2.11 | length 3.7
  Top Layer w0.254: U2.11 26.435,8.825 R3.7
GP2/NEUTRAL_BTN: C3.2 R2.5 U1.12 | length 5
  Top Layer w0.254: U1.12 v1(28.125,37.38) 30.085,37.38 R2.5
  Bottom Layer w0.254: C3.2 v1(28.125,37.38)
GP2/NEUTRAL_LED: R3.6 U2.12 | length 3.7
  Top Layer w0.254: U2.12 26.435,10.095 R3.6
GP3/REVERSE_BTN: C4.2 R2.4 U1.13 | length 9.5
  Top Layer w0.254: U1.13 v1(28.125,38.65) 30.085,38.65 R2.4
  Bottom Layer w0.254: C4.2 v1(28.125,38.65)
GP3/REVERSE_LED: R3.5 U2.13 | length 3.7
  Top Layer w0.254: U2.13 26.435,11.365 R3.5
GP4/HAZARDS_BTN: C5.1 R2.3 U1.14 | length 5
  Top Layer w0.254: U1.14 v1(28.125,39.92) 30.085,39.92 R2.3
  Bottom Layer w0.254: C5.1 v1(28.125,39.92)
GP4/HAZARDS_LED: R3.4 U2.14 | length 3.7
  Top Layer w0.254: U2.14@26.435,12.635 R3.4
GP5/LOWBEAMS_BTN: C6.1 R2.2 U1.15 | length 9.5
  Top Layer w0.254: U1.15 v1(28.125,41.19) 30.085,41.19 R2.2
  Bottom Layer w0.254: C6.1 v1(28.125,41.19)
GP5/LOWBEAMS_LED: R3.3 U2.15 | length 3.7
  Top Layer w0.254: U2.15 26.435,13.905 R3.3
GP6/DRL_BTN: C7.1 R2.1 U1.16 | length 5
  Top Layer w0.254: U1.16 v1(28.125,42.46) 30.085,42.46 R2.1
  Bottom Layer w0.254: C7.1 v1(28.125,42.46)
GP6/DRL_LED: R3.2 U2.16 | length 3.7
  Top Layer w0.254: U2.16 26.435,15.175 R3.2
GP7/BPS_FAULT_LED: R3.1 U2.17 | length 3.7
  Top Layer w0.254: U2.17 26.435,16.445 R3.1
I2C_SCL: Q1.3 R5.2 TP4.TP U1.1 U2.1 U4.4 | length 41.3
  Top Layer w0.254: R5.2 v1(10.16,32.704) U4.4 11.125,32.182 15.24,28.067 TP4.TP U2.1 ; v1(15.25,45) U1.1
  Bottom Layer w0.254: Q1.3 6.005,32.704 v1(10.16,32.704) 10.16,39.91 v1(15.25,45)
I2C_SDA: Q2.3 R7.2 TP5.TP U1.2 U2.2 U4.5 | length 41.6
  Top Layer w0.254: R7.2 v1(10.16,30.804) U4.5 11.125,24.492 12.573,23.044 12.573,18.542 14.635,16.48 U2.2 ; v1(15.25,43.73) U1.2
  Bottom Layer w0.254: Q2.3 6.013,30.804 v1(10.16,30.804) 15.25,35.894 v1(15.25,43.73)
NetLED1_1: LED1.1 R2.9 | length 10.8
  Top Layer w0.254: R2.9 34.9,27.881 LED1.1
NetP1_2: P1.2 R1.7 R2.10 | length 16.7
  Top Layer w0.254: R2.10 35.279,34.825 37.104,33 P1.2 47.859,33 49.684,34.825 R1.7
NetP1_3: P1.3 R1.6 R2.11 | length 16.2
  Top Layer w0.254: R2.11 35.346,36.095 36.441,35 P1.3 48.641,35 49.66,36.019 50.1,36.019 R1.6
NetP1_4: P1.4 R1.5 R2.12 | length 15.5
  Top Layer w0.254: R2.12 35.265,37 P1.4 49.735,37 R1.5
NetP1_5: P1.5 R1.4 R2.13 | length 15.5
  Top Layer w0.254: R2.13 35.265,39 P1.5 49.735,39 R1.4
NetP1_6: P1.6 R1.3 R2.14 | length 16.3
  Top Layer w0.254: R2.14@34.9,39.981 R2.14 35.333,39.905 36.428,41 P1.6 48.662,41 48.721,40.941 48.721,40.935 49.751,39.905 R1.3 R1.3@50.1,39.981
NetP1_7: P1.7 R1.2 R2.15 | length 16.7
  Top Layer w0.254: R2.15 35.333,41.175 37.158,43 P1.7 47.932,43 48.721,42.211 48.721,42.205 49.751,41.175 R1.2
NetP1_8: P1.8 R1.1 R2.16 | length 17.3
  Top Layer w0.254: R2.16 37.455,45 P1.8 47.545,45 R1.1
NetP2_1: P2.1 R3.9 | length 6.2
  Top Layer w0.254: R3.9 37.455,5 P2.1
NetP2_2: P2.2 R3.10 | length 5.9
  Top Layer w0.254: R3.10 35.249,8.825 36.279,7.795 36.279,7.79 37.069,7 P2.2
NetP2_3: P2.3 R3.11 | length 5.6
  Top Layer w0.254: R3.11 35.249,10.095 36.279,9.065 36.279,9.06 36.339,9 P2.3
NetP2_4: P2.4 R3.12 | length 5.8
  Top Layer w0.254: R3.12 35.265,11 P2.4 P2.4@39.635,11.365
NetP2_5: P2.5 R3.13 | length 5.8
  Top Layer w0.254: R3.13 35.265,13 P2.5 P2.5@39.635,12.635
NetP2_6: P2.6 R3.14 | length 5.6
  Top Layer w0.254: R3.14 35.249,13.905 36.344,15 P2.6
NetP2_7: P2.7 R3.15 | length 5.9
  Top Layer w0.254: R3.15 35.328,15.175 37.153,17 P2.7
NetP2_8: P2.8 R3.16 | length 6.2
  Top Layer w0.254: R3.16 37.455,19 P2.8
PA9: P4.6 U2.8 | length 34.4
  Top Layer w0.254: P4.6 8.308,38.5 8.767,38.041 8.767,26.276 12.065,22.978 12.065,13.458 16.663,8.86 U2.8
PA10: P4.5 U1.8 | length 10.9
  Top Layer w0.254: P4.5 8.382,39 11.272,36.11 U1.8
PB8/I2C1_SCL: P4.32 Q1.2 R4.2 | length 7.5
  Top Layer w0.254: v1(2.286,32.258) 2.544,32 P4.32
  Bottom Layer w0.254: v1@2.37,32.342 v1(2.286,32.258) 2.426,32.258 R4.2 4.686,33.515 6.28,35.109 Q1.2
PB9/I2C1_SDA: P4.31 Q2.2 R6.1 | length 5.8
  Top Layer w0.254: v1(2.286,31.242) 2.544,31.5 P4.31
  Bottom Layer w0.254: v1@2.286,31.155 v1(2.286,31.242) 2.934,30.594 R6.1 4.642,28.391 Q2.2
pads on no net: P1. P2. P3. P4. P4.7 P4.8 P4.9 P4.10 P4.11 P4.12 P4.13 P4.14 P4.15 P4.16 P4.17 P4.18 P4.19 P4.20 P4.21 P4.22 P4.23 P4.24 P4.25 P4.30 P4.33 P4.34 P4.35 P4.36 P4.37 P4.38 P4.39 P4.46 R1.8 R1.9 U1.7 U2.7 U3.4 U4.3
copper on no net: | length 220
  Top Layer w0.254: 0,0 0,50 60,50 60,0 0,0

## Polygon pours and split planes (outlines as drawn)
GND on Bottom Layer (solid, remove dead copper, pour order 18): 0,0 60,0 60,50 0,50 0,50.292
no net on Bottom Layer "Bottom Layer-No Net" (solid, pour order 2): 22.479,5.588
+5V on Top Layer (solid, remove dead copper, pour order 20): 0,0 60,0 60,50 0,50
no net on Top Layer "Top Layer-No Net" (solid, pour order 6): 21.971,21.844

## Silkscreen, mask and mechanical layers (free items; w line width, h text height)
Top Overlay:
  drawing of 20 lines, arcs and shapes, not listed
  text "TO BUTTONS" at 40.64,25.146 h0.8
  text "TO LEDS" at 41.91,24.003 h0.8
  text "SDA" at 11.938,18.542 h0.8
  text "SCL" at 14.478,18.542 h0.8
  text "3V3" at 3.302,16.637 h0.8
  text "MSXII CENTER CONSOLE / REV 3.0" at 57.5,15 h0.8 r90
  text "5V" at 3.302,14.097 h0.8
  text "GND" at 3.302,11.557 h0.8